# Altium PCB PCB1.PcbDoc (part 2 of 3)
Units mm, origin at the board's own origin, x right, y up, seen from the top; angles counter-clockwise.
Board outline 297.31 x 194.82 mm, 2 copper layers (Top Layer, Bottom Layer); 61 components, 34 nets, 159 pads, 65 vias.
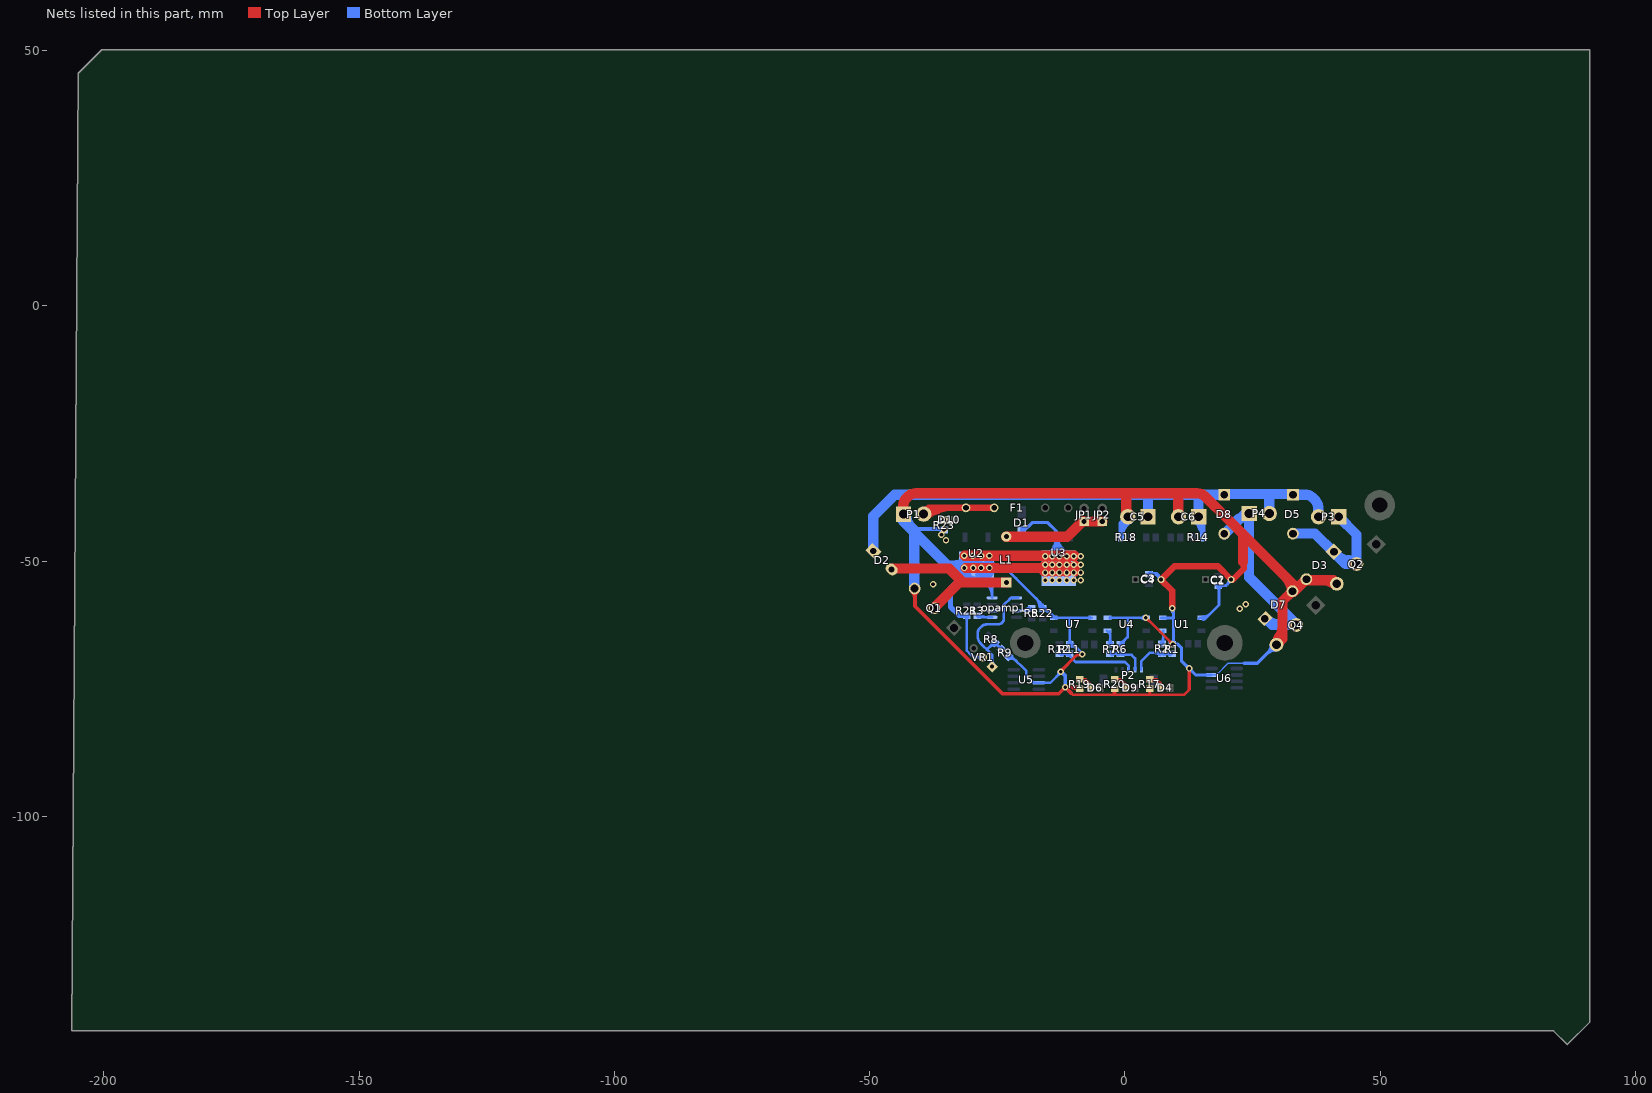
[diagram p2: the nets of this part, all layers, seen from the top]

## Via types
v1: diameter 1.27, hole 0.711, Top Layer to Bottom Layer, 63 vias
v2: diameter 1.016, hole 0.711, Top Layer to Bottom Layer, 2 vias

## Nets (pads, with @x,y where several pads share a name; then routed paths per layer and width w, separated by ;. In a path a pad name is that pad's centre, name@x,y a point inside that pad or via, vN(x,y) a via of type N, cw(c..) or ccw(c..) an arc to the next point about the centre after c; other vN are vias at no path point) (continued)
GND: C1.1 C2.2 C3.1 C4.2 C5.2 C6.2 D1.1 D3.1 D7.1 opamp1.4 P1.1 Q1.3 Q2.3 Q4.3 R1.2 R6.2 R9.1 R11.2 R17.1 R18.1 R19.1 R20.1 R21.2 R22.2 R23.1 U1.2 U1.3 U2.4 U3.4 U4.2 U4.3 U5.3 U6.3 U7.2 U7.3 VR1.2 | length 1292.9
  Top Layer w0.5: -10.541,-75.819 -10.229,-76.131 4.895,-76.131 ; R17.1@4.543,-75.274 cw(c3.86,-75.957) 4.826,-75.957 cw(c5.792,-75.957) R17.1@5.109,-75.274 ; 4.826,-76.073 R17.1@4.826,-74.991 ; 4.953,-76.073 4.895,-76.131 ; 12.573,-75.184 11.626,-76.131 4.895,-76.131
  Top Layer w0.508: v1@4.064,-61.468 cw(c4.064,-62.694) 4.931,-61.827 ; v1@4.127,-61.023 v1(9.398,-66.294) ; v1@4.445,-61.087 ccw(c5.058,-61.087) 4.625,-61.521 ; v1@9.017,-66.294 ccw(c8.097,-66.294) 8.748,-65.644 ccw(c9.398,-64.993) v1@9.398,-65.913
  Top Layer w0.635: v1@-12.7,-71.628 -9.398,-68.326 ; v1@-8.615,-67.984 cw(c-9.398,-67.26) -9.398,-68.326 ; v1@-8.382,-68.326 -9.398,-68.326 ; v1@-12.255,-71.628 cw(c-11.182,-71.628) -11.941,-70.869 ccw(c-11.182,-71.628) v1@-12.255,-71.628
  Top Layer w0.75: Q1.3@-41.148,-55.245 -41.148,-58.801 -39.478,-60.471 -39.478,-60.477 -24.003,-75.952 -12.96,-75.952 v1(-11.684,-74.676) ; -10.541,-75.819 v1(-11.684,-74.676) ; -10.414,-74.676 cw(c-10.414,-76.415) R19.1@-9.184,-75.185 ; R19.1@-8.89,-74.93 -9.144,-74.676 v1(-11.684,-74.676) ; R20.1@-2.226,-75.185 cw(c-2.696,-75.655) -2.032,-75.655 cw(c-1.368,-75.655) R20.1@-1.838,-75.185 ; -2.032,-76.006 R20.1@-2.032,-74.991 ; 12.573,-75.057 v1(12.573,-70.993) ; Q1.3@-41.74,-55.876 cw(c-43.168,-57.305) -41.148,-57.305 ; Q1.3@-41.74,-55.876 cw(c-43.168,-57.305) -41.148,-57.305 ; Q1.3@-41.74,-55.876 cw(c-43.168,-57.305) -41.148,-57.305 ; -41.148,-57.094 cw(c-39.426,-57.094) Q1.3@-40.644,-55.876 ; -41.148,-57.094 cw(c-39.426,-57.094) Q1.3@-40.644,-55.876 ; -41.148,-57.094 cw(c-39.426,-57.094) Q1.3@-40.644,-55.876
  Top Layer w1.27: v1(9.271,-59.182) 9.271,-55.793 C4.2@7.072,-53.594 9.739,-50.927 18.161,-50.927 20.828,-53.594 21.082,-53.594 23.241,-51.435 23.241,-50.292 23.114,-50.165 22.987,-50.038
  Top Layer w2: P1.1@-43.434,-40.767 -43.434,-39.263 cw(c-40.894,-39.263) -42.69,-37.467 -42.654,-37.431 cw(c-40.858,-39.227) -40.858,-36.687 14.045,-36.687 cw(c14.045,-39.227) 15.841,-37.431 17.027,-38.617 ; v1@-31.369,-48.895 v1(-28.194,-48.895) v1(-26.543,-48.895) v1@-9.906,-48.895 ; v1@-31.242,-51.308 v1(-26.543,-51.308) -10.287,-51.308 ccw(c-10.287,-53.181) v1@-11.707,-51.959 ; -16.886,-51.308 cw(c-16.886,-53.462) v1@-15.363,-51.939 ; -16.273,-51.308 ccw(c-16.273,-50.021) v1@-15.363,-50.931 ; v1@-15.879,-51.939 cw(c-14.356,-53.462) -14.356,-51.308 ; v1@-15.879,-50.931 ccw(c-14.969,-50.021) -14.969,-51.308 ; -15.489,-51.308 cw(c-15.489,-53.462) v1@-13.966,-51.939 ; -14.876,-51.308 ccw(c-14.876,-50.021) v1@-13.966,-50.931 ; v1@-14.482,-51.939 cw(c-12.959,-53.462) -12.959,-51.308 ; v1@-14.482,-50.931 ccw(c-13.572,-50.021) -13.572,-51.308 ; -14.092,-51.308 cw(c-14.092,-53.462) v1@-12.569,-51.939 ; -13.479,-51.308 ccw(c-13.479,-50.021) v1@-12.569,-50.931 ; v1@-13.085,-51.939 cw(c-11.562,-53.462) -11.562,-51.308 ; v1@-13.085,-50.931 ccw(c-12.175,-50.021) -12.175,-51.308 ; -12.695,-51.308 cw(c-12.695,-53.462) v1@-11.172,-51.939 ; -12.082,-51.308 ccw(c-12.082,-50.021) v1@-11.172,-50.931 ; v1@-11.688,-50.931 ccw(c-10.778,-50.021) -10.778,-51.308 ; -11.298,-51.308 cw(c-11.298,-53.462) v1@-9.775,-51.939 ; -10.685,-51.308 ccw(c-10.685,-50.021) v1@-9.775,-50.931 ; 0.254,-36.83 0.254,-41.275 C5.2@0.56,-41.275 ; 10.414,-38.1 10.414,-41.223 C6.2@10.466,-41.275 ; 17.204,-38.803 18.596,-40.195 18.605,-40.195 23.114,-44.704 ; 23.114,-50.165 23.114,-44.704 ; Q4.3@29.674,-66.338 30.861,-65.151 30.861,-57.785 32.639,-56.007 33.02,-56.007 D3.1@35.533,-53.494 ; 32.815,-54.405 23.114,-44.704 ; D3.1@35.306,-53.721 40.767,-53.721 Q2.3@41.529,-54.483 ; 0.254,-39.329 ccw(c2.506,-39.329) C5.2@0.914,-40.921 ; 0.254,-39.329 ccw(c2.506,-39.329) C5.2@0.914,-40.921 ; 0.254,-39.329 ccw(c2.506,-39.329) C5.2@0.914,-40.921 ; Q4.3@29.427,-66.09 ccw(c25.964,-62.628) 30.861,-62.628 ; Q4.3@29.427,-66.09 ccw(c25.964,-62.628) 30.861,-62.628 ; Q4.3@29.427,-66.09 ccw(c25.964,-62.628) 30.861,-62.628 ; Q4.3@30.012,-66.247 cw(c31.943,-65.73) 30.212,-64.73 ; Q4.3@30.012,-66.247 cw(c31.943,-65.73) 30.212,-64.73 ; Q4.3@30.012,-66.247 cw(c31.943,-65.73) 30.212,-64.73 ; 31.498,-53.088 cw(c28.732,-55.853) D7.1@32.643,-55.853 ; 31.498,-53.088 cw(c28.732,-55.853) D7.1@32.643,-55.853 ; 31.498,-53.088 cw(c28.732,-55.853) D7.1@32.643,-55.853 ; 39.002,-53.721 cw(c39.002,-56.883) Q2.3@41.238,-54.647 ; 39.002,-53.721 cw(c39.002,-56.883) Q2.3@41.238,-54.647 ; 39.002,-53.721 cw(c39.002,-56.883) Q2.3@41.238,-54.647 ; 39.989,-53.926 ccw(c40.839,-52.454) Q2.3@41.375,-54.068 ; 39.989,-53.926 ccw(c40.839,-52.454) Q2.3@41.375,-54.068 ; 39.989,-53.926 ccw(c40.839,-52.454) Q2.3@41.375,-54.068 ; -11.78,-51.366 ccw(c-12.063,-50.307) -11.114,-50.855 cw(c-12.063,-50.307) -11.78,-51.366 ; v1@-11.746,-50.855 ccw(c-10.797,-50.307) -11.08,-51.366 cw(c-10.797,-50.307) v1@-11.746,-50.855 ; -10.317,-51.316 ccw(c-10.573,-50.361) -9.717,-50.856 cw(c-10.573,-50.361) -10.317,-51.316
  Bottom Layer w0.305: U6.3@16.981,-72.263 17.907,-72.263 20.193,-69.977 23.241,-69.977 ; Q4.3@29.591,-66.294 Q4.3@29.718,-66.294 ; U6.3@17.881,-72.065 ccw(c17.881,-71.526) 18.263,-71.907 ; U6.3@17.881,-72.065 ccw(c17.881,-71.526) 18.263,-71.907 ; U6.3@17.881,-72.065 ccw(c17.881,-71.526) 18.263,-71.907 ; U6.3@18.079,-72.263 cw(c18.493,-72.263) 18.2,-71.97 ; U6.3@18.079,-72.263 cw(c18.493,-72.263) 18.2,-71.97 ; U6.3@18.079,-72.263 cw(c18.493,-72.263) 18.2,-71.97
  Bottom Layer w0.508: R21.2@-30.988,-60.64 -30.988,-67.509 -30.151,-68.346 -29.79,-68.707 VR1.2@-27.686,-68.707 ; U2.4@-28.357,-52.233 -26.022,-54.568 opamp1.4@-26.022,-57.036 ; U2.4@-26.543,-51.181 -23.499,-51.181 ; opamp1.4@-26.035,-57.023 opamp1.4@-26.022,-57.036 ; opamp1.4@-26.022,-57.15 opamp1.4@-26.022,-57.036 ; R9.1@-22.823,-68.924 R9.1@-22.823,-68.617 ; R9.1@-22.733,-68.707 -22.098,-68.707 -19.304,-71.501 -19.304,-72.517 -18.034,-73.787 U5.3@-16.981,-73.787 ; U5.3@-16.854,-73.787 -14.605,-73.787 v1@-12.446,-71.628 ; R22.2@-16.162,-59.215 R22.2@-16.129,-59.248 -15.555,-59.248 U7.2@-13.652,-61.151 ; R22.2@-16.129,-59.055 -16.129,-58.547 ; R22.2@-16.029,-59.644 cw(c-16.029,-61.744) -14.544,-60.259 ; -14.996,-59.807 cw(c-16.277,-61.087) U7.2@-14.466,-61.087 ; U7.2@-13.97,-61.087 -10.795,-61.087 ; U7.2@-13.531,-61.226 cw(c-13.197,-61.56) -13.197,-61.087 cw(c-13.197,-60.614) U7.2@-13.531,-60.948 ; -9.122,-67.332 cw(c-9.989,-68.199) v1@-8.763,-68.199 ; -8.816,-67.638 ccw(c-8.382,-67.205) v1@-8.382,-67.818 ; v1@-8.255,-68.199 -10.221,-66.233 R11.2@-10.795,-66.233 -10.795,-61.087 ; U7.3@-6.789,-61.226 ccw(c-7.123,-61.56) -7.123,-61.087 ccw(c-7.123,-60.614) U7.3@-6.789,-60.948 ; U7.3@-6.477,-61.087 -10.795,-61.087 ; U4.2@-2.99,-61.226 cw(c-2.656,-61.56) -2.656,-61.087 cw(c-2.656,-60.614) U4.2@-2.99,-60.948 ; U4.2@-2.988,-61.223 cw(c-2.667,-61.533) -2.667,-61.087 ; U4.2@-2.988,-60.951 ccw(c-2.667,-60.641) -2.667,-61.087 ; R6.2@-0.889,-66.233 0.508,-64.836 0.508,-61.087 ; U4.3@3.752,-61.226 ccw(c3.418,-61.56) 3.418,-61.087 ccw(c3.418,-60.614) U4.3@3.752,-60.948 ; U4.3@3.795,-61.356 ccw(c3.144,-62.007) 3.144,-61.087 ccw(c3.144,-60.167) U4.3@3.795,-60.818 ; v1(4.064,-61.087) 0.508,-61.087 ; U1.3@14.478,-61.214 14.605,-61.087 15.875,-61.087 18.415,-58.547 18.415,-54.991 18.161,-54.737 19.812,-54.737 C2.2@20.828,-53.721 ; U1.3@15.286,-61.399 ccw(c15.286,-60.73) 15.759,-61.203 ; U1.3@15.286,-60.891 ccw(c15.286,-58.996) 16.626,-60.336 ; U1.3@15.425,-61.226 cw(c15.759,-61.56) 15.759,-61.087 cw(c15.759,-60.614) U1.3@15.425,-60.948 ; R21.2@-31.268,-60.92 cw(c-31.944,-61.596) -30.988,-61.596 ; R21.2@-31.268,-60.92 cw(c-31.944,-61.596) -30.988,-61.596 ; R21.2@-31.268,-60.92 cw(c-31.944,-61.596) -30.988,-61.596 ; -30.988,-61.596 cw(c-30.032,-61.596) R21.2@-30.708,-60.92 ; -30.988,-61.596 cw(c-30.032,-61.596) R21.2@-30.708,-60.92 ; -30.988,-61.596 cw(c-30.032,-61.596) R21.2@-30.708,-60.92 ; -29.438,-68.707 cw(c-29.438,-70.459) VR1.2@-28.199,-69.22 ; -29.438,-68.707 cw(c-29.438,-70.459) VR1.2@-28.199,-69.22 ; -29.438,-68.707 cw(c-29.438,-70.459) VR1.2@-28.199,-69.22 ; U2.4@-29.388,-51.117 ccw(c-28.083,-50.36) U2.4@-28.471,-51.818 ; U2.4@-29.388,-51.117 ccw(c-28.083,-50.36) U2.4@-28.471,-51.818 ; U2.4@-29.388,-51.117 ccw(c-28.083,-50.36) U2.4@-28.471,-51.818 ; U2.4@-29.388,-51.117 ccw(c-28.083,-50.36) U2.4@-28.471,-51.818 ; U2.4@-29.388,-51.117 ccw(c-28.083,-50.36) U2.4@-28.471,-51.818 ; U2.4@-29.107,-53.687 cw(c-29.141,-56.806) -26.022,-56.806 ; U2.4@-29.107,-53.687 cw(c-29.141,-56.806) -26.022,-56.806 ; U2.4@-29.107,-53.687 cw(c-29.141,-56.806) -26.022,-56.806 ; U2.4@-29.101,-53.179 cw(c-29.135,-56.292) -26.022,-56.292 ; U2.4@-29.101,-53.179 cw(c-29.135,-56.292) -26.022,-56.292 ; U2.4@-29.101,-53.179 cw(c-29.135,-56.292) -26.022,-56.292 ; U2.4@-29.095,-52.671 cw(c-29.13,-55.778) -26.022,-55.778 ; U2.4@-29.095,-52.671 cw(c-29.13,-55.778) -26.022,-55.778 ; U2.4@-29.095,-52.671 cw(c-29.13,-55.778) -26.022,-55.778 ; U2.4@-29.09,-52.163 cw(c-29.124,-55.265) -26.022,-55.265 ; U2.4@-29.09,-52.163 cw(c-29.124,-55.265) -26.022,-55.265 ; U2.4@-29.09,-52.163 cw(c-29.124,-55.265) -26.022,-55.265 ; U2.4@-29.084,-51.655 cw(c-29.118,-54.751) U2.4@-26.022,-54.751 ; U2.4@-29.084,-51.655 cw(c-29.118,-54.751) U2.4@-26.022,-54.751 ; U2.4@-29.084,-51.655 cw(c-29.118,-54.751) U2.4@-26.022,-54.751 ; -28.825,-68.707 ccw(c-28.825,-67.822) VR1.2@-28.199,-68.448 ; -28.825,-68.707 ccw(c-28.825,-67.822) VR1.2@-28.199,-68.448 ; -28.825,-68.707 ccw(c-28.825,-67.822) VR1.2@-28.199,-68.448 ; U2.4@-28.319,-51.331 ccw(c-27.144,-51.113) U2.4@-27.82,-52.098 ; U2.4@-28.319,-51.331 ccw(c-27.144,-51.113) U2.4@-27.82,-52.098 ; U2.4@-28.319,-51.331 ccw(c-27.144,-51.113) U2.4@-27.82,-52.098 ; U2.4@-28.319,-51.331 ccw(c-27.144,-51.113) U2.4@-27.82,-52.098 ; U2.4@-28.319,-51.331 ccw(c-27.144,-51.113) U2.4@-27.82,-52.098 ; U2.4@-27.819,-51.238 ccw(c-25.438,-50.797) U2.4@-26.81,-52.793 ; U2.4@-27.819,-51.238 ccw(c-25.438,-50.797) U2.4@-26.81,-52.793 ; U2.4@-27.819,-51.238 ccw(c-25.438,-50.797) U2.4@-26.81,-52.793 ; U2.4@-27.819,-51.238 ccw(c-25.438,-50.797) U2.4@-26.81,-52.793 ; U2.4@-27.819,-51.238 ccw(c-25.438,-50.797) U2.4@-26.81,-52.793 ; U2.4@-27.399,-50.178 cw(c-28.24,-51.195) U2.4@-26.923,-51.283 ; U2.4@-27.399,-50.178 cw(c-28.24,-51.195) U2.4@-26.923,-51.283 ; U2.4@-27.399,-50.178 cw(c-28.24,-51.195) U2.4@-26.923,-51.283 ; U2.4@-27.399,-50.178 cw(c-28.24,-51.195) U2.4@-26.923,-51.283 ; U2.4@-27.399,-50.178 cw(c-28.24,-51.195) U2.4@-26.923,-51.283 ; U2.4@-27.351,-50.217 ccw(c-25.476,-48.875) -25.476,-51.181 ; U2.4@-27.351,-50.217 ccw(c-25.476,-48.875) -25.476,-51.181 ; U2.4@-27.351,-50.217 ccw(c-25.476,-48.875) -25.476,-51.181 ; U2.4@-27.185,-52.424 cw(c-25.157,-53.458) -25.157,-51.181 ; U2.4@-27.185,-52.424 cw(c-25.157,-53.458) -25.157,-51.181 ; U2.4@-27.185,-52.424 cw(c-25.157,-53.458) -25.157,-51.181 ; U2.4@-27.165,-52.401 ccw(c-28,-51.658) U2.4@-26.913,-51.397 ; U2.4@-27.165,-52.401 ccw(c-28,-51.658) U2.4@-26.913,-51.397 ; U2.4@-27.165,-52.401 ccw(c-28,-51.658) U2.4@-26.913,-51.397 ; U2.4@-27.165,-52.401 ccw(c-28,-51.658) U2.4@-26.913,-51.397 ; U2.4@-27.165,-52.401 ccw(c-28,-51.658) U2.4@-26.913,-51.397 ; U2.4@-27.067,-51.666 ccw(c-26.533,-51.301) U2.4@-26.296,-51.904 ; U2.4@-27.067,-51.666 ccw(c-26.533,-51.301) U2.4@-26.296,-51.904 ; U2.4@-27.067,-51.666 ccw(c-26.533,-51.301) U2.4@-26.296,-51.904 ; U2.4@-27.067,-51.666 ccw(c-26.533,-51.301) U2.4@-26.296,-51.904 ; U2.4@-27.067,-51.666 ccw(c-26.533,-51.301) U2.4@-26.296,-51.904 ; U2.4@-26.983,-49.88 cw(c-27.608,-50.558) U2.4@-26.854,-51.088 ; U2.4@-26.983,-49.88 cw(c-27.608,-50.558) U2.4@-26.854,-51.088 ; U2.4@-26.983,-49.88 cw(c-27.608,-50.558) U2.4@-26.854,-51.088 ; U2.4@-26.983,-49.88 cw(c-27.608,-50.558) U2.4@-26.854,-51.088 ; U2.4@-26.983,-49.88 cw(c-27.608,-50.558) U2.4@-26.854,-51.088 ; U2.4@-26.938,-49.921 ccw(c-24.487,-48.167) -24.487,-51.181 ; U2.4@-26.938,-49.921 ccw(c-24.487,-48.167) -24.487,-51.181 ; U2.4@-26.938,-49.921 ccw(c-24.487,-48.167) -24.487,-51.181 ; U2.4@-26.733,-52.655 cw(c-24.328,-53.88) -24.328,-51.181 ; U2.4@-26.733,-52.655 cw(c-24.328,-53.88) -24.328,-51.181 ; U2.4@-26.733,-52.655 cw(c-24.328,-53.88) -24.328,-51.181 ; U2.4@-26.648,-51.38 ccw(c-25.992,-50.932) U2.4@-25.703,-51.671 ; U2.4@-26.648,-51.38 ccw(c-25.992,-50.932) U2.4@-25.703,-51.671 ; U2.4@-26.648,-51.38 ccw(c-25.992,-50.932) U2.4@-25.703,-51.671 ; U2.4@-26.648,-51.38 ccw(c-25.992,-50.932) U2.4@-25.703,-51.671 ; U2.4@-26.648,-51.38 ccw(c-25.992,-50.932) U2.4@-25.703,-51.671 ; U2.4@-26.557,-50.272 cw(c-27.13,-50.894) U2.4@-26.439,-51.381 ; U2.4@-26.557,-50.272 cw(c-27.13,-50.894) U2.4@-26.439,-51.381 ; U2.4@-26.557,-50.272 cw(c-27.13,-50.894) U2.4@-26.439,-51.381 ; U2.4@-26.557,-50.272 cw(c-27.13,-50.894) U2.4@-26.439,-51.381 ; U2.4@-26.557,-50.272 cw(c-27.13,-50.894) U2.4@-26.439,-51.381 ; U2.4@-26.525,-49.626 ccw(c-23.499,-47.459) -23.499,-51.181 ; U2.4@-26.525,-49.626 ccw(c-23.499,-47.459) -23.499,-51.181 ; U2.4@-26.525,-49.626 ccw(c-23.499,-47.459) -23.499,-51.181 ; U2.4@-26.28,-52.885 cw(c-23.499,-54.302) -23.499,-51.181 ; U2.4@-26.28,-52.885 cw(c-23.499,-54.302) -23.499,-51.181 ; U2.4@-26.28,-52.885 cw(c-23.499,-54.302) -23.499,-51.181 ; U2.4@-26.238,-51.08 ccw(c-25.74,-50.709) -25.559,-51.303 ; U2.4@-26.238,-51.08 ccw(c-25.74,-50.709) -25.559,-51.303 ; U2.4@-26.238,-51.08 ccw(c-25.74,-50.709) -25.559,-51.303 ; U2.4@-26.238,-51.08 ccw(c-25.74,-50.709) -25.559,-51.303 ; U2.4@-26.238,-51.08 ccw(c-25.74,-50.709) -25.559,-51.303 ; U2.4@-26.228,-51.093 ccw(c-25.452,-50.564) -25.109,-51.438 ; U2.4@-26.228,-51.093 ccw(c-25.452,-50.564) -25.109,-51.438 ; U2.4@-26.228,-51.093 ccw(c-25.452,-50.564) -25.109,-51.438 ; U2.4@-26.228,-51.093 ccw(c-25.452,-50.564) -25.109,-51.438 ; U2.4@-26.228,-51.093 ccw(c-25.452,-50.564) -25.109,-51.438 ; U2.4@-26.131,-50.665 cw(c-26.653,-51.231) U2.4@-26.024,-51.674 ; U2.4@-26.131,-50.665 cw(c-26.653,-51.231) U2.4@-26.024,-51.674 ; U2.4@-26.131,-50.665 cw(c-26.653,-51.231) U2.4@-26.024,-51.674 ; U2.4@-26.131,-50.665 cw(c-26.653,-51.231) U2.4@-26.024,-51.674 ; U2.4@-26.131,-50.665 cw(c-26.653,-51.231) U2.4@-26.024,-51.674 ; -23.499,-51.181 -21.336,-53.344 -21.332,-53.344 -16.129,-58.547 ; R9.1@-22.85,-68.602 ccw(c-21.954,-68.086) -22.222,-69.084 ; R9.1@-22.85,-68.602 ccw(c-21.954,-68.086) -22.222,-69.084 ; R9.1@-22.85,-68.602 ccw(c-21.954,-68.086) -22.222,-69.084 ; R9.1@-22.753,-68.942 cw(c-22.753,-71.09) -21.234,-69.571 ; R9.1@-22.753,-68.942 cw(c-22.753,-71.09) -21.234,-69.571 ; R9.1@-22.753,-68.942 cw(c-22.753,-71.09) -21.234,-69.571 ; R9.1@-22.753,-68.434 cw(c-22.753,-69.355) R9.1@-22.101,-68.704 ; R9.1@-22.753,-68.434 cw(c-22.753,-69.355) R9.1@-22.101,-68.704 ; R9.1@-22.753,-68.434 cw(c-22.753,-69.355) R9.1@-22.101,-68.704 ; -18.396,-73.425 ccw(c-17.754,-72.783) U5.3@-17.754,-73.691 ; -18.396,-73.425 ccw(c-17.754,-72.783) U5.3@-17.754,-73.691 ; -18.396,-73.425 ccw(c-17.754,-72.783) U5.3@-17.754,-73.691 ; -18.17,-73.58 cw(c-18.312,-74.109) U5.3@-17.837,-73.835 ; -18.17,-73.58 cw(c-18.312,-74.109) U5.3@-17.837,-73.835 ; -18.17,-73.58 cw(c-18.312,-74.109) U5.3@-17.837,-73.835 ; -17.471,-57.205 cw(c-19.515,-59.248) R22.2@-16.625,-59.248 ; -17.471,-57.205 cw(c-19.515,-59.248) R22.2@-16.625,-59.248 ; -17.471,-57.205 cw(c-19.515,-59.248) R22.2@-16.625,-59.248 ; -16.604,-58.072 cw(c-17.78,-59.248) R22.2@-16.117,-59.248 ; -16.604,-58.072 cw(c-17.78,-59.248) R22.2@-16.117,-59.248 ; -16.604,-58.072 cw(c-17.78,-59.248) R22.2@-16.117,-59.248 ; R22.2@-16.333,-58.909 ccw(c-16.551,-58.547) -16.129,-58.547 ; R22.2@-16.333,-58.909 ccw(c-16.551,-58.547) -16.129,-58.547 ; R22.2@-16.333,-58.909 ccw(c-16.551,-58.547) -16.129,-58.547 ; -16.129,-58.547 ccw(c-15.707,-58.547) R22.2@-15.925,-58.909 ; -16.129,-58.547 ccw(c-15.707,-58.547) R22.2@-15.925,-58.909 ; -16.129,-58.547 ccw(c-15.707,-58.547) R22.2@-15.925,-58.909 ; R11.2@-11.075,-65.953 ccw(c-11.751,-65.277) -10.795,-65.277 ; R11.2@-11.075,-65.953 ccw(c-11.751,-65.277) -10.795,-65.277 ; R11.2@-11.075,-65.953 ccw(c-11.751,-65.277) -10.795,-65.277 ; -10.795,-65.277 ccw(c-9.839,-65.277) R11.2@-10.515,-65.953 ; -10.795,-65.277 ccw(c-9.839,-65.277) R11.2@-10.515,-65.953 ; -10.795,-65.277 ccw(c-9.839,-65.277) R11.2@-10.515,-65.953 ; R11.2@-10.793,-66.288 ccw(c-9.91,-65.791) R11.2@-10.172,-66.769 ; R11.2@-10.793,-66.288 ccw(c-9.91,-65.791) R11.2@-10.172,-66.769 ; R11.2@-10.793,-66.288 ccw(c-9.91,-65.791) R11.2@-10.172,-66.769 ; R11.2@-10.695,-66.629 cw(c-10.695,-68.729) -9.21,-67.244 ; R11.2@-10.695,-66.629 cw(c-10.695,-68.729) -9.21,-67.244 ; R11.2@-10.695,-66.629 cw(c-10.695,-68.729) -9.21,-67.244 ; -2.667,-61.087 0.508,-61.087 ; R6.2@-0.789,-65.837 ccw(c-0.789,-65.122) R6.2@-0.284,-65.628 ; R6.2@-0.789,-65.837 ccw(c-0.789,-65.122) R6.2@-0.284,-65.628 ; R6.2@-0.789,-65.837 ccw(c-0.789,-65.122) R6.2@-0.284,-65.628 ; R6.2@-0.393,-66.233 cw(c0.804,-66.233) -0.042,-65.386 ; R6.2@-0.393,-66.233 cw(c0.804,-66.233) -0.042,-65.386 ; R6.2@-0.393,-66.233 cw(c0.804,-66.233) -0.042,-65.386 ; C1.1@18.108,-55.078 cw(c17.367,-55.819) 18.415,-55.819 ; C1.1@18.108,-55.078 cw(c17.367,-55.819) 18.415,-55.819 ; C1.1@18.108,-55.078 cw(c17.367,-55.819) 18.415,-55.819 ; 18.415,-55.689 cw(c19.279,-55.689) C1.1@18.668,-55.078 ; 18.415,-55.689 cw(c19.279,-55.689) C1.1@18.668,-55.078 ; 18.415,-55.689 cw(c19.279,-55.689) C1.1@18.668,-55.078 ; C1.1@18.668,-55.078 cw(c19.491,-55.901) 19.491,-54.737 ; C1.1@18.668,-55.078 cw(c19.491,-55.901) 19.491,-54.737 ; C1.1@18.668,-55.078 cw(c19.491,-55.901) 19.491,-54.737 ; C1.1@18.668,-54.518 ccw(c19.197,-53.989) 19.197,-54.737 ; C1.1@18.668,-54.518 ccw(c19.197,-53.989) 19.197,-54.737 ; C1.1@18.668,-54.518 ccw(c19.197,-53.989) 19.197,-54.737 ; 19.951,-54.598 ccw(c18.947,-53.594) C2.2@20.367,-53.594 ; 19.951,-54.598 ccw(c18.947,-53.594) C2.2@20.367,-53.594 ; 19.951,-54.598 ccw(c18.947,-53.594) C2.2@20.367,-53.594 ; 20.24,-54.066 cw(c21.019,-54.275) C2.2@20.76,-53.512 ; 20.24,-54.066 cw(c21.019,-54.275) C2.2@20.76,-53.512 ; 20.24,-54.066 cw(c21.019,-54.275) C2.2@20.76,-53.512 ; 20.354,-54.195 cw(c20.788,-54.628) C2.2@20.788,-54.015 ; 20.354,-54.195 cw(c20.788,-54.628) C2.2@20.788,-54.015 ; 20.354,-54.195 cw(c20.788,-54.628) C2.2@20.788,-54.015 ; U2.4@-29.494,-51.616 cw(c-29.195,-52.027) -28.836,-51.667 ccw(c-29.195,-52.027) U2.4@-29.494,-51.616 ; U2.4@-28.16,-51.186 cw(c-28.384,-51.987) -27.633,-51.629 ccw(c-28.384,-51.987) U2.4@-28.16,-51.186 ; U2.4@-27.009,-50.85 ccw(c-26.174,-50.685) -26.608,-51.417 cw(c-26.174,-50.685) U2.4@-27.009,-50.85 ; U2.4@-26.926,-51.88 cw(c-25.976,-51.905) -26.63,-51.216 ccw(c-25.976,-51.905) U2.4@-26.926,-51.88 ; U2.4@-26.274,-51.577 cw(c-25.317,-52.534) -25.317,-51.181 ccw(c-25.317,-52.534) U2.4@-26.274,-51.577 ; R22.2@-16.767,-58.716 ccw(c-15.767,-58.448) -16.285,-59.345 cw(c-15.767,-58.448) R22.2@-16.767,-58.716 ; -13.313,-72.495 ccw(c-14.18,-71.628) -12.954,-71.628 cw(c-14.18,-71.628) -13.313,-72.495 ; -13.007,-72.189 cw(c-12.573,-72.622) -12.573,-72.009 ccw(c-12.573,-72.622) -13.007,-72.189
  Bottom Layer w0.6: P1.1@-43.382,-41.967 cw(c-43.382,-44.864) -41.333,-42.816 cw(c-39.285,-40.767) P1.1@-42.182,-40.767 ; P1.1@-43.382,-40.767 -40.461,-43.688 ; -36.832,-43.688 cw(c-36.832,-45.175) R23.1@-35.78,-44.123 ; -36.548,-43.688 cw(c-36.548,-44.93) R23.1@-35.67,-44.052
  Bottom Layer w0.635: D1.1@-20.193,-44.418 -18.193,-42.418 -15.113,-42.418 -13.462,-44.069 ; U3.4@-14.449,-48.797 ccw(c-16.83,-46.416) -13.462,-46.416 ; U3.4@-14.224,-49.34 cw(c-14.224,-51.946) U3.4@-12.381,-50.103 ; U3.4@-14.224,-48.704 cw(c-14.224,-49.778) U3.4@-13.465,-49.019 ; U3.4@-14.195,-48.67 ccw(c-15.963,-46.902) -13.462,-46.902 ; U3.4@-14.113,-48.724 ccw(c-13.897,-48.145) U3.4@-13.361,-48.454 ; U3.4@-13.999,-49.247 ccw(c-15.297,-47.949) U3.4@-13.462,-47.949 ; U3.4@-13.97,-49.212 cw(c-13.97,-50.899) U3.4@-12.778,-49.706 ; U3.4@-13.949,-48.863 ccw(c-12.936,-48.278) U3.4@-13.238,-49.409 ; U3.4@-13.79,-47.969 ccw(c-12.682,-48.609) U3.4@-13.917,-48.94 ; U3.4@-13.745,-49.12 ccw(c-14.43,-48.435) U3.4@-13.462,-48.435 ; U3.4@-13.462,-48.255 ccw(c-12.06,-48.255) U3.4@-13.052,-49.247 ; -13.462,-46.722 ccw(c-10.527,-46.722) U3.4@-12.602,-48.797 ; U3.4@-13.125,-50.563 ccw(c-14.495,-50.055) U3.4@-13.462,-49.022 ; U3.4@-12.761,-49.723 cw(c-13.473,-50.434) U3.4@-12.529,-50.783 ; U3.4@-12.532,-49.139 ccw(c-11.644,-49.49) -12.319,-50.165 U3.4@-13.462,-49.022 ; U1.2@7.112,-61.087 9.525,-61.087 ; v1@9.271,-59.055 9.525,-59.309 R1.2@9.525,-66.04 ; R1.2@9.283,-66.233 10.353,-66.233 11.049,-66.929 11.049,-69.469 13.843,-72.263 U6.3@16.891,-72.263 ; 9.381,-59.986 cw(c9.767,-59.762) v1@9.477,-59.423 ; v1@12.255,-70.993 ccw(c11.489,-70.993) 12.031,-70.451 ccw(c12.573,-69.909) v1@12.573,-70.675 ; v1@12.573,-71.31 cw(c12.573,-72.077) 13.115,-71.535 cw(c13.657,-70.993) v1@12.89,-70.993 ; 23.368,-69.977 25.908,-69.977 29.547,-66.338 Q4.3@29.674,-66.338 ; D1.1@-20.287,-43.976 cw(c-19.178,-44.469) D1.1@-19.492,-43.298 ; D1.1@-20.287,-43.976 cw(c-19.178,-44.469) D1.1@-19.492,-43.298 ; D1.1@-20.287,-43.976 cw(c-19.178,-44.469) D1.1@-19.492,-43.298 ; D1.1@-20.193,-43.486 ccw(c-20.193,-41.234) -18.601,-42.826 ; D1.1@-20.193,-43.486 ccw(c-20.193,-41.234) -18.601,-42.826 ; D1.1@-20.193,-43.486 ccw(c-20.193,-41.234) -18.601,-42.826 ; U3.4@-15.68,-48.71 ccw(c-16.123,-46.364) -14.15,-47.709 ; U3.4@-15.68,-48.71 ccw(c-16.123,-46.364) -14.15,-47.709 ; U3.4@-15.68,-48.71 ccw(c-16.123,-46.364) -14.15,-47.709 ; U3.4@-15.134,-49.15 ccw(c-19.169,-45.115) -13.462,-45.115 ; U3.4@-15.134,-49.15 ccw(c-19.169,-45.115) -13.462,-45.115 ; U3.4@-15.134,-49.15 ccw(c-19.169,-45.115) -13.462,-45.115 ; U3.4@-14.685,-49.599 ccw(c-17.636,-46.648) -13.462,-46.648 ; U3.4@-14.685,-49.599 ccw(c-17.636,-46.648) -13.462,-46.648 ; U3.4@-14.685,-49.599 ccw(c-17.636,-46.648) -13.462,-46.648 ; U3.4@-14.517,-49.145 cw(c-13.548,-48.737) U3.4@-14.486,-48.262 ; U3.4@-14.517,-49.145 cw(c-13.548,-48.737) U3.4@-14.486,-48.262 ; U3.4@-14.517,-49.145 cw(c-13.548,-48.737) U3.4@-14.486,-48.262 ; U3.4@-13.931,-48.899 cw(c-11.893,-48.039) -13.867,-47.039 ; U3.4@-13.931,-48.899 cw(c-11.893,-48.039) -13.867,-47.039 ; U3.4@-13.931,-48.899 cw(c-11.893,-48.039) -13.867,-47.039 ; U3.4@-13.917,-48.94 cw(c-12.813,-48.644) U3.4@-13.803,-48.073 ; U3.4@-13.917,-48.94 cw(c-12.813,-48.644) U3.4@-13.803,-48.073 ; U3.4@-13.917,-48.94 cw(c-12.813,-48.644) U3.4@-13.803,-48.073 ; U3.4@-13.462,-49.022 -13.462,-44.069 ; -13.462,-47.922 ccw(c-10.351,-47.922) U3.4@-12.239,-50.394 ; -13.462,-47.922 ccw(c-10.351,-47.922) U3.4@-12.239,-50.394 ; -13.462,-47.922 ccw(c-10.351,-47.922) U3.4@-12.239,-50.394 ; -13.462,-46.638 ccw(c-9.37,-46.638) U3.4@-11.854,-49.89 ; -13.462,-46.638 ccw(c-9.37,-46.638) U3.4@-11.854,-49.89 ; -13.462,-46.638 ccw(c-9.37,-46.638) U3.4@-11.854,-49.89 ; -13.462,-45.353 ccw(c-8.389,-45.353) U3.4@-11.468,-49.385 ; -13.462,-45.353 ccw(c-8.389,-45.353) U3.4@-11.468,-49.385 ; -13.462,-45.353 ccw(c-8.389,-45.353) U3.4@-11.468,-49.385 ; -13.462,-44.069 ccw(c-7.408,-44.069) U3.4@-11.083,-48.88 ; -13.462,-44.069 ccw(c-7.408,-44.069) U3.4@-11.083,-48.88 ; -13.462,-44.069 ccw(c-7.408,-44.069) U3.4@-11.083,-48.88 ; U3.4@-13.12,-49.251 cw(c-13.954,-49.894) U3.4@-13.088,-50.492 ; U3.4@-13.12,-49.251 cw(c-13.954,-49.894) U3.4@-13.088,-50.492 ; U3.4@-13.12,-49.251 cw(c-13.954,-49.894) U3.4@-13.088,-50.492 ; U3.4@-13.11,-48.877 ccw(c-14.187,-48.327) U3.4@-13.036,-47.955 ; U3.4@-13.11,-48.877 ccw(c-14.187,-48.327) U3.4@-13.036,-47.955 ; U3.4@-13.11,-48.877 ccw(c-14.187,-48.327) U3.4@-13.036,-47.955 ; U3.4@-13.104,-48.867 ccw(c-14.747,-47.95) -13.071,-47.094 ; U3.4@-13.104,-48.867 ccw(c-14.747,-47.95) -13.071,-47.094 ; U3.4@-13.104,-48.867 ccw(c-14.747,-47.95) -13.071,-47.094 ; U3.4@-13.011,-48.763 cw(c-12.566,-49.39) U3.4@-12.031,-48.839 ; U3.4@-13.011,-48.763 cw(c-12.566,-49.39) U3.4@-12.031,-48.839 ; U3.4@-13.011,-48.763 cw(c-12.566,-49.39) U3.4@-12.031,-48.839 ; U3.4@-12.831,-49.339 cw(c-12.846,-50.42) U3.4@-12.072,-49.666 ; U3.4@-12.831,-49.339 cw(c-12.846,-50.42) U3.4@-12.072,-49.666 ; U3.4@-12.831,-49.339 cw(c-12.846,-50.42) U3.4@-12.072,-49.666 ; U3.4@-12.643,-49.281 cw(c-12.117,-50.024) U3.4@-11.483,-49.371 ; U3.4@-12.643,-49.281 cw(c-12.117,-50.024) U3.4@-11.483,-49.371 ; U3.4@-12.643,-49.281 cw(c-12.117,-50.024) U3.4@-11.483,-49.371 ; U3.4@-12.59,-49.94 cw(c-13.203,-50.413) U3.4@-12.566,-50.854 ; U3.4@-12.59,-49.94 cw(c-13.203,-50.413) U3.4@-12.566,-50.854 ; U3.4@-12.59,-49.94 cw(c-13.203,-50.413) U3.4@-12.566,-50.854 ; U3.4@-12.55,-49.177 ccw(c-13.499,-48.647) U3.4@-12.531,-48.152 ; U3.4@-12.55,-49.177 ccw(c-13.499,-48.647) U3.4@-12.531,-48.152 ; U3.4@-12.55,-49.177 ccw(c-13.499,-48.647) U3.4@-12.531,-48.152 ; U3.4@-12.522,-49.11 ccw(c-11.207,-49.49) U3.4@-12.301,-50.312 ; U3.4@-12.522,-49.11 ccw(c-11.207,-49.49) U3.4@-12.301,-50.312 ; U3.4@-12.522,-49.11 ccw(c-11.207,-49.49) U3.4@-12.301,-50.312 ; U3.4@-12.469,-48.087 ccw(c-11.18,-47.094) U3.4@-11.389,-48.707 ; U3.4@-12.469,-48.087 ccw(c-11.18,-47.094) U3.4@-11.389,-48.707 ; U3.4@-12.469,-48.087 ccw(c-11.18,-47.094) U3.4@-11.389,-48.707 ; U3.4@-12.307,-48.685 ccw(c-11.884,-47.926) U3.4@-11.551,-48.729 ; U3.4@-12.307,-48.685 ccw(c-11.884,-47.926) U3.4@-11.551,-48.729 ; U3.4@-12.307,-48.685 ccw(c-11.884,-47.926) U3.4@-11.551,-48.729 ; -12.202,-47.544 cw(c-13.724,-48.819) U3.4@-11.746,-48.994 ; -12.202,-47.544 cw(c-13.724,-48.819) U3.4@-11.746,-48.994 ; -12.202,-47.544 cw(c-13.724,-48.819) U3.4@-11.746,-48.994 ; R1.2@9.148,-65.998 ccw(c8.238,-65.088) 9.525,-65.088 ; R1.2@9.148,-65.998 ccw(c8.238,-65.088) 9.525,-65.088 ; R1.2@9.148,-65.998 ccw(c8.238,-65.088) 9.525,-65.088 ; R1.2@9.618,-66.468 cw(c10.186,-67.036) 10.186,-66.233 ; R1.2@9.618,-66.468 cw(c10.186,-67.036) 10.186,-66.233 ; R1.2@9.618,-66.468 cw(c10.186,-67.036) 10.186,-66.233 ; R1.2@9.618,-65.998 ccw(c10.186,-65.43) 10.186,-66.233 ; R1.2@9.618,-65.998 ccw(c10.186,-65.43) 10.186,-66.233 ; R1.2@9.618,-65.998 ccw(c10.186,-65.43) 10.186,-66.233 ; 27.695,-68.19 cw(c29.674,-70.17) Q4.3@29.674,-67.37 ; 27.695,-68.19 cw(c29.674,-70.17) Q4.3@29.674,-67.37 ; 27.695,-68.19 cw(c29.674,-70.17) Q4.3@29.674,-67.37 ; 28.001,-67.884 ccw(c26.456,-66.338) Q4.3@28.642,-66.338 ; 28.001,-67.884 ccw(c26.456,-66.338) Q4.3@28.642,-66.338 ; 28.001,-67.884 ccw(c26.456,-66.338) Q4.3@28.642,-66.338 ; U3.4@-15.68,-48.583 ccw(c-16.168,-45.996) -13.994,-47.48 cw(c-16.168,-45.996) U3.4@-15.68,-48.583 ; U3.4@-15.562,-49.207 ccw(c-15.766,-48.127) -14.858,-48.746 cw(c-15.766,-48.127) U3.4@-15.562,-49.207 ; U3.4@-15.321,-49.127 cw(c-13.241,-49.856) -14.197,-47.869 ccw(c-13.241,-49.856) U3.4@-15.321,-49.127 ; U3.4@-15.215,-49.247 cw(c-14.638,-49.732) -14.168,-49.143 ccw(c-14.638,-49.732) U3.4@-15.215,-49.247 ; U3.4@-14.795,-48.748 cw(c-14.232,-49.222) -13.772,-48.647 ccw(c-14.232,-49.222) U3.4@-14.795,-48.748 ; U3.4@-14.699,-49.618 cw(c-13.836,-50.318) -13.94,-49.211 ccw(c-13.836,-50.318) U3.4@-14.699,-49.618 ; U3.4@-14.333,-48.031 ccw(c-13.388,-48.466) -14.226,-49.083 cw(c-13.388,-48.466) U3.4@-14.333,-48.031 ; U3.4@-14.292,-49.048 cw(c-15.64,-51.208) -13.139,-50.732 ccw(c-15.64,-51.208) U3.4@-14.292,-49.048 ; U3.4@-14.179,-48.708 ccw(c-14.058,-47.863) -13.298,-48.25 cw(c-14.058,-47.863) U3.4@-14.179,-48.708 ; U3.4@-14.042,-49.204 cw(c-14.74,-52.192) -12.134,-50.572 ccw(c-14.74,-52.192) U3.4@-14.042,-49.204 ; U3.4@-13.92,-48.93 ccw(c-12.942,-48.634) -13.424,-49.535 cw(c-12.942,-48.634) U3.4@-13.92,-48.93 ; U3.4@-13.907,-49.033 ccw(c-12.909,-49.067) -13.639,-49.748 cw(c-12.909,-49.067) U3.4@-13.907,-49.033 ; U3.4@-13.898,-48.586 cw(c-14.247,-50.08) -12.943,-49.27 ccw(c-14.247,-50.08) U3.4@-13.898,-48.586 ; -13.884,-47.054 ccw(c-12.399,-47.736) -13.714,-48.707 cw(c-12.399,-47.736) -13.884,-47.054 ; -13.793,-47.763 ccw(c-12.559,-48.13) -13.691,-48.744 cw(c-12.559,-48.13) -13.793,-47.763 ; U3.4@-13.736,-49.113 cw(c-13.024,-49.449) -12.694,-48.734 ccw(c-13.024,-49.449) U3.4@-13.736,-49.113 ; U3.4@-13.734,-49.107 ccw(c-14.618,-48.312) -13.435,-48.195 cw(c-14.618,-48.312) U3.4@-13.734,-49.107 ; U3.4@-13.511,-48.739 ccw(c-13.246,-48.457) -13.016,-48.767 cw(c-13.246,-48.457) U3.4@-13.511,-48.739 ; U3.4@-13.436,-48.255 ccw(c-12.057,-48.29) -13.057,-49.241 cw(c-12.057,-48.29) U3.4@-13.436,-48.255 ; U3.4@-13.381,-48.92 ccw(c-13.594,-47.719) -12.382,-47.858 cw(c-13.594,-47.719) U3.4@-13.381,-48.92 ; -13.316,-47.33 ccw(c-11.155,-46.459) -12.068,-48.603 cw(c-11.155,-46.459) -13.316,-47.33 ; -13.245,-47.412 cw(c-14.203,-48.239) -13.103,-48.865 ccw(c-14.203,-48.239) -13.245,-47.412 ; U3.4@-13.133,-48.937 ccw(c-12.238,-49.186) -12.881,-49.856 cw(c-12.238,-49.186) U3.4@-13.133,-48.937 ; U3.4@-13.061,-49.816 cw(c-13.699,-50.839) -12.515,-50.614 ccw(c-13.699,-50.839) U3.4@-13.061,-49.816 ; U3.4@-13.025,-48.773 ccw(c-14.16,-47.345) -12.347,-47.553 cw(c-14.16,-47.345) U3.4@-13.025,-48.773 ; U3.4@-12.885,-48.71 ccw(c-12.997,-48.102) -12.386,-48.011 cw(c-12.997,-48.102) U3.4@-12.885,-48.71 ; U3.4@-12.769,-49.334 ccw(c-12.877,-48.749) -12.289,-48.662 cw(c-12.877,-48.749) U3.4@-12.769,-49.334 ; -12.718,-46.898 cw(c-14.334,-48.05) -12.487,-48.779 ccw(c-14.334,-48.05) -12.718,-46.898 ; U3.4@-12.657,-48.092 cw(c-13.374,-48.711) -12.551,-49.179 ccw(c-13.374,-48.711) U3.4@-12.657,-48.092 ; -12.585,-47.897 cw(c-13.634,-48.458) -12.496,-48.803 ccw(c-13.634,-48.458) -12.585,-47.897 ; U3.4@-12.521,-49.107 ccw(c-11.078,-49.509) -12.115,-50.591 cw(c-11.078,-49.509) U3.4@-12.521,-49.107 ; U3.4@-12.394,-47.959 ccw(c-11.151,-48.101) -11.761,-49.193 cw(c-11.151,-48.101) U3.4@-12.394,-47.959 ; -12.249,-47.75 cw(c-12.851,-48.714) -11.74,-48.955 ccw(c-12.851,-48.714) -12.249,-47.75 ; U3.4@-12.218,-48.749 ccw(c-11.909,-48.431) -11.63,-48.775 cw(c-11.909,-48.431) U3.4@-12.218,-48.749 ; U3.4@-12.124,-49.205 cw(c-11.967,-49.919) -11.477,-49.377 ccw(c-11.967,-49.919) U3.4@-12.124,-49.205 ; -12.039,-47.851 cw(c-13.036,-48.562) -11.897,-49.011 ccw(c-13.036,-48.562) -12.039,-47.851 ; -11.982,-47.916 ccw(c-10.457,-46.494) -10.53,-48.578 cw(c-10.457,-46.494) -11.982,-47.916 ; U3.4@-11.929,-49.073 ccw(c-11.395,-49.435) -11.846,-49.897 cw(c-11.395,-49.435) U3.4@-11.929,-49.073 ; U3.4@-11.483,-48.228 cw(c-11.913,-48.917) -11.12,-49.089 ccw(c-11.913,-48.917) U3.4@-11.483,-48.228 ; U3.4@-11.33,-48.333 cw(c-11.833,-49.979) -10.313,-49.171 ccw(c-11.833,-49.979) U3.4@-11.33,-48.333 ; v1@9.046,-59.407 cw(c7.891,-60.562) 9.525,-60.562 ccw(c7.891,-60.562) v1@9.046,-59.407 ; R1.2@9.173,-66.069 ccw(c8.325,-65.221) 9.525,-65.221 cw(c8.325,-65.221) R1.2@9.173,-66.069 ; R1.2@9.623,-66.519 cw(c10.312,-67.208) 10.312,-66.233 ccw(c10.312,-67.208) R1.2@9.623,-66.519
  Bottom Layer w0.75: -40.461,-43.688 R23.1@-35.433,-43.688 ; v1@-12.446,-71.628 -11.684,-72.39 v1(-11.684,-74.676) ; C3.1@4.699,-52.517 6.162,-52.517 C4.2@7.112,-53.467 ; C4.2@7.092,-53.574 C4.2@7.112,-53.594 ; C3.1@4.993,-52.711 cw(c5.463,-53.181) 5.463,-52.517 ; C3.1@4.993,-52.711 cw(c5.463,-53.181) 5.463,-52.517 ; C3.1@4.993,-52.711 cw(c5.463,-53.181) 5.463,-52.517 ; C3.1@4.993,-52.323 ccw(c5.463,-51.853) 5.463,-52.517 ; C3.1@4.993,-52.323 ccw(c5.463,-51.853) 5.463,-52.517 ; C3.1@4.993,-52.323 ccw(c5.463,-51.853) 5.463,-52.517 ; 6.442,-52.797 cw(c5.645,-53.594) C4.2@6.772,-53.594 ; 6.442,-52.797 cw(c5.645,-53.594) C4.2@6.772,-53.594 ; 6.442,-52.797 cw(c5.645,-53.594) C4.2@6.772,-53.594 ; v1@-12.573,-71.888 cw(c-12.573,-72.822) -11.912,-72.162 ccw(c-12.573,-72.822) v1@-12.573,-71.888
  Bottom Layer w1: U2.4@-31.788,-51.893 cw(c-31.043,-52.093) U2.4@-31.428,-51.425 ; R21.2@-30.988,-60.64 -31.049,-60.579 -32.512,-60.579 -34.163,-58.928 -34.163,-55.245 ; U2.4@-30.303,-51.6 ccw(c-30.503,-50.855) U2.4@-29.835,-51.24 ; R18.1@-0.762,-45.085 -0.762,-42.597 C5.2@0.56,-41.275 ; -34.163,-55.245 cw(c-31.342,-58.066) U2.4@-30.034,-54.297 ; -34.163,-55.245 cw(c-31.342,-58.066) U2.4@-30.034,-54.297 ; -34.163,-55.245 cw(c-31.342,-58.066) U2.4@-30.034,-54.297 ; -34.163,-55.245 U2.4@-30.099,-51.181 ; -33.049,-54.131 ccw(c-35.624,-51.557) U2.4@-31.983,-51.557 ; -33.049,-54.131 ccw(c-35.624,-51.557) U2.4@-31.983,-51.557 ; -33.049,-54.131 ccw(c-35.624,-51.557) U2.4@-31.983,-51.557 ; -33.034,-54.116 cw(c-30.76,-56.39) U2.4@-29.706,-53.352 ; -33.034,-54.116 cw(c-30.76,-56.39) U2.4@-29.706,-53.352 ; -33.034,-54.116 cw(c-30.76,-56.39) U2.4@-29.706,-53.352 ; U2.4@-32.226,-52.464 cw(c-30.573,-52.908) U2.4@-31.428,-51.425 ; U2.4@-32.226,-52.464 cw(c-30.573,-52.908) U2.4@-31.428,-51.425 ; U2.4@-32.226,-52.464 cw(c-30.573,-52.908) U2.4@-31.428,-51.425 ; U2.4@-32.226,-52.464 cw(c-30.573,-52.908) U2.4@-31.428,-51.425 ; U2.4@-32.226,-52.464 cw(c-30.573,-52.908) U2.4@-31.428,-51.425 ; U2.4@-31.631,-51.308 cw(c-35.023,-51.308) -32.624,-53.706 ccw(c-35.023,-51.308) U2.4@-31.631,-51.308 ; U2.4@-31.631,-51.308 cw(c-32.402,-51.308) -31.857,-51.853 ccw(c-32.402,-51.308) U2.4@-31.631,-51.308 ; U2.4@-30.099,-51.181 cw(c-30.766,-50.514) -31.405,-51.209 ccw(c-30.766,-50.514) U2.4@-30.099,-51.181 ; R18.1@-0.762,-45.308 cw(c2.901,-45.308) C5.2@1.062,-42.14 ; R18.1@-0.762,-45.308 cw(c2.901,-45.308) C5.2@1.062,-42.14 ; R18.1@-0.762,-45.308 cw(c2.901,-45.308) C5.2@1.062,-42.14 ; -0.762,-43.571 cw(c1.893,-43.571) C5.2@0.56,-41.275 ; -0.762,-43.571 cw(c1.893,-43.571) C5.2@0.56,-41.275 ; -0.762,-43.571 cw(c1.893,-43.571) C5.2@0.56,-41.275 ; -0.272,-43.48 ccw(c-1.094,-42.663) C5.2@-0.206,-41.918 ; -0.272,-43.48 ccw(c-1.094,-42.663) C5.2@-0.206,-41.918 ; -0.272,-43.48 ccw(c-1.094,-42.663) C5.2@-0.206,-41.918 ; U2.4@-30.816,-51.898 cw(c-29.718,-52.995) -29.718,-51.443 ccw(c-29.718,-52.995) U2.4@-30.816,-51.898
  Bottom Layer w2: P1.1@-43.561,-40.513 -43.561,-42.037 -41.275,-44.323 ; P1.1@-42.882,-40.767 ccw(c-38.177,-40.767) -41.504,-44.094 ; Q1.3@-41.275,-55.245 -41.275,-44.323 ; -41.275,-44.323 -34.798,-50.8 ; -34.798,-50.8 cw(c-34.798,-55.27) U2.4@-31.079,-52.789 ; -34.798,-50.8 cw(c-34.798,-55.27) U2.4@-31.079,-52.789 ; -34.798,-50.8 cw(c-34.798,-55.27) U2.4@-31.079,-52.789 ; -34.798,-50.8 -28.448,-50.8 U2.4@-27.686,-51.562 ; -33.291,-50.8 ccw(c-33.291,-47.249) U2.4@-30.78,-49.76 ; -33.291,-50.8 ccw(c-33.291,-47.249) U2.4@-30.78,-49.76 ; -33.291,-50.8 ccw(c-33.291,-47.249) U2.4@-30.78,-49.76 ; U2.4@-32.312,-51.687 ccw(c-31.885,-50.488) U2.4@-31.34,-51.638 ; U2.4@-32.312,-51.687 ccw(c-31.885,-50.488) U2.4@-31.34,-51.638 ; U2.4@-32.312,-51.687 ccw(c-31.885,-50.488) U2.4@-31.34,-51.638 ; U2.4@-32.312,-51.687 ccw(c-31.885,-50.488) U2.4@-31.34,-51.638 ; U2.4@-32.312,-51.687 ccw(c-31.885,-50.488) U2.4@-31.34,-51.638 ; U2.4@-31.861,-51.29 ccw(c-30.398,-51.361) U2.4@-31.482,-52.345 ; U2.4@-31.861,-51.29 ccw(c-30.398,-51.361) U2.4@-31.482,-52.345 ; U2.4@-31.861,-51.29 ccw(c-30.398,-51.361) U2.4@-31.482,-52.345 ; U2.4@-31.861,-51.29 ccw(c-30.398,-51.361) U2.4@-31.482,-52.345 ; U2.4@-31.861,-51.29 ccw(c-30.398,-51.361) U2.4@-31.482,-52.345 ; U2.4@-27.686,-51.562 ccw(c-29.295,-53.171) -29.799,-50.952 cw(c-29.295,-53.171) U2.4@-27.686,-51.562 ; U2.4@-28.305,-50.943 ccw(c-26.543,-49.182) -26.543,-51.673 cw(c-26.543,-49.182) U2.4@-28.305,-50.943
  other v1: -12.573,-71.628 -8.382,-68.199 22.479,-59.309 23.622,-58.42 -37.592,-54.483 -15.621,-53.721 -14.224,-53.721 -12.827,-53.721 -11.43,-53.721 -10.033,-53.721 -8.636,-53.721 -15.621,-52.197 -14.224,-52.197 -12.827,-52.197 -11.43,-52.197 -10.033,-52.197 -8.636,-52.197 -31.496,-51.308 -29.718,-51.308 -28.194,-51.308 -15.621,-50.673 -14.224,-50.673 -12.827,-50.673 -11.43,-50.673 -10.033,-50.673 -8.636,-50.673 -15.621,-49.022 -14.224,-49.022 -12.827,-49.022 -11.43,-49.022 -10.033,-49.022 -8.636,-49.022 -31.496,-48.895 -29.845,-48.895 -35.052,-45.847 -35.941,-44.831 -35.433,-43.815
"IN AB": opamp1.2 opamp1.5 R8.1 R9.2 VR1.1 | length 50.2
  Bottom Layer w0.508: -28.385,-63.056 ccw(c-27.311,-64.129) -28.829,-64.129 -28.829,-64.643 ccw(c-26.683,-64.643) -28.201,-66.16 ; -28.384,-63.056 -28.135,-62.806 cw(c-27.051,-63.89) -27.051,-62.357 -24.923,-62.357 ccw(c-24.923,-61.056) -24.003,-61.976 ccw(c-24.616,-61.363) -23.749,-61.363 -23.749,-58.547 ; -28.2,-66.161 -27.813,-66.548 -27.051,-67.31 ; VR1.1@-26.035,-70.612 -26.035,-68.326 -27.051,-67.31 ; opamp1.2@-26.022,-59.69 -24.892,-59.69 -23.749,-58.547 ; R9.2@-24.003,-67.437 R9.2@-24.167,-67.273 R8.1@-25.49,-65.95 -25.691,-65.95 -27.051,-67.31 ; opamp1.5@-20.955,-57.15 opamp1.5@-21.222,-57.15 -22.352,-57.15 -23.749,-58.547 ; -26.579,-66.838 cw(c-25.561,-67.857) R8.1@-25.561,-66.416 ; -26.579,-66.838 cw(c-25.561,-67.857) R8.1@-25.561,-66.416 ; -26.579,-66.838 cw(c-25.561,-67.857) R8.1@-25.561,-66.416 ; VR1.1@-26.403,-70.244 ccw(c-27.292,-69.355) -26.035,-69.355 ; VR1.1@-26.403,-70.244 ccw(c-27.292,-69.355) -26.035,-69.355 ; VR1.1@-26.403,-70.244 ccw(c-27.292,-69.355) -26.035,-69.355 ; -26.035,-69.268 ccw(c-24.655,-69.268) VR1.1@-25.631,-70.244 ; -26.035,-69.268 ccw(c-24.655,-69.268) VR1.1@-25.631,-70.244 ; -26.035,-69.268 ccw(c-24.655,-69.268) VR1.1@-25.631,-70.244 ; R8.1@-25.49,-66.346 cw(c-25.49,-67.302) -24.814,-66.626 ; R8.1@-25.49,-66.346 cw(c-25.49,-67.302) -24.814,-66.626 ; R8.1@-25.49,-66.346 cw(c-25.49,-67.302) -24.814,-66.626 ; opamp1.2@-25.222,-59.644 ccw(c-25.222,-58.736) -24.58,-59.378 ; opamp1.2@-25.222,-59.644 ccw(c-25.222,-58.736) -24.58,-59.378 ; opamp1.2@-25.222,-59.644 ccw(c-25.222,-58.736) -24.58,-59.378 ; R8.1@-25.094,-65.95 ccw(c-24.138,-65.95) -24.814,-66.626 ; R8.1@-25.094,-65.95 ccw(c-24.138,-65.95) -24.814,-66.626 ; R8.1@-25.094,-65.95 ccw(c-24.138,-65.95) -24.814,-66.626 ; -24.843,-66.597 cw(c-25.519,-67.273) R9.2@-24.563,-67.273 ; -24.843,-66.597 ccw(c-24.167,-65.921) R9.2@-24.167,-66.877 ; -24.843,-66.597 cw(c-25.519,-67.273) R9.2@-24.563,-67.273 ; -24.843,-66.597 ccw(c-24.167,-65.921) R9.2@-24.167,-66.877 ; -24.843,-66.597 cw(c-25.519,-67.273) R9.2@-24.563,-67.273 ; -24.843,-66.597 ccw(c-24.167,-65.921) R9.2@-24.167,-66.877 ; -22.664,-57.462 cw(c-22.022,-58.104) opamp1.5@-22.022,-57.196 ; -22.664,-57.462 cw(c-22.022,-58.104) opamp1.5@-22.022,-57.196 ; -22.664,-57.462 cw(c-22.022,-58.104) opamp1.5@-22.022,-57.196
"MICRO 1": P2.3 R11.1 R12.2 | length 24.7
  Bottom Layer w0.508: R12.2@-12.827,-68.133 R11.1@-10.795,-68.133 -10.795,-68.58 -9.652,-69.723 0,-69.723 0.722,-70.445 P2.3@0.722,-71.247 0.722,-71.334 P2.3@0.762,-71.374 ; R12.2@-12.447,-68.413 cw(c-11.771,-69.089) -11.771,-68.133 ; R12.2@-12.447,-68.413 cw(c-11.771,-69.089) -11.771,-68.133 ; R12.2@-12.447,-68.413 cw(c-11.771,-69.089) -11.771,-68.133 ; R12.2@-12.447,-67.853 ccw(c-11.771,-67.177) -11.771,-68.133 ; R12.2@-12.447,-67.853 ccw(c-11.771,-67.177) -11.771,-68.133 ; R12.2@-12.447,-67.853 ccw(c-11.771,-67.177) -11.771,-68.133 ; -11.851,-68.133 cw(c-11.851,-69.089) R11.1@-11.175,-68.413 ; -11.851,-68.133 ccw(c-11.851,-67.177) R11.1@-11.175,-67.853 ; -11.851,-68.133 cw(c-11.851,-69.089) R11.1@-11.175,-68.413 ; -11.851,-68.133 ccw(c-11.851,-67.177) R11.1@-11.175,-67.853 ; -11.851,-68.133 cw(c-11.851,-69.089) R11.1@-11.175,-68.413 ; -11.851,-68.133 ccw(c-11.851,-67.177) R11.1@-11.175,-67.853
"MICRO 2": P2.4 R6.1 R7.2 | length 20.3
  Bottom Layer w0.508: R7.2@-2.921,-68.133 R6.1@-0.889,-68.133 -0.696,-68.326 1.27,-68.326 1.972,-69.028 P2.4@1.972,-71.247 ; R7.2@-2.541,-68.413 cw(c-1.865,-69.089) -1.865,-68.133 ; R7.2@-2.541,-68.413 cw(c-1.865,-69.089) -1.865,-68.133 ; R7.2@-2.541,-68.413 cw(c-1.865,-69.089) -1.865,-68.133 ; R7.2@-2.541,-67.853 ccw(c-1.865,-67.177) -1.865,-68.133 ; R7.2@-2.541,-67.853 ccw(c-1.865,-67.177) -1.865,-68.133 ; R7.2@-2.541,-67.853 ccw(c-1.865,-67.177) -1.865,-68.133 ; -1.945,-68.133 cw(c-1.945,-69.089) R6.1@-1.269,-68.413 ; -1.945,-68.133 ccw(c-1.945,-67.177) R6.1@-1.269,-67.853 ; -1.945,-68.133 cw(c-1.945,-69.089) R6.1@-1.269,-68.413 ; -1.945,-68.133 ccw(c-1.945,-67.177) R6.1@-1.269,-67.853 ; -1.945,-68.133 cw(c-1.945,-69.089) R6.1@-1.269,-68.413 ; -1.945,-68.133 ccw(c-1.945,-67.177) R6.1@-1.269,-67.853 ; R6.1@-0.509,-67.853 ccw(c0.633,-66.711) 0.633,-68.326 ; R6.1@-0.509,-67.853 ccw(c0.633,-66.711) 0.633,-68.326 ; R6.1@-0.509,-67.853 ccw(c0.633,-66.711) 0.633,-68.326
"MICRO 3": P2.5 R1.1 R2.2 | length 21.1
  Bottom Layer w0.508: P2.5@3.222,-71.247 3.222,-69.549 4.826,-67.945 7.088,-67.945 R2.2@7.251,-68.108 9.258,-68.108 R1.1@9.283,-68.133 ; 5.801,-67.945 cw(c5.801,-69.458) R2.2@6.871,-68.388 ; 5.801,-67.945 cw(c5.801,-69.458) R2.2@6.871,-68.388 ; 5.801,-67.945 cw(c5.801,-69.458) R2.2@6.871,-68.388 ; R2.2@7.631,-68.388 cw(c8.307,-69.064) 8.307,-68.108 ; R2.2@7.631,-68.388 cw(c8.307,-69.064) 8.307,-68.108 ; R2.2@7.631,-68.388 cw(c8.307,-69.064) 8.307,-68.108 ; R2.2@7.631,-67.828 ccw(c8.307,-67.152) 8.307,-68.108 ; R2.2@7.631,-67.828 ccw(c8.307,-67.152) 8.307,-68.108 ; R2.2@7.631,-67.828 ccw(c8.307,-67.152) 8.307,-68.108 ; 8.167,-68.108 cw(c8.167,-69.15) R1.1@8.903,-68.413 ; 8.167,-68.108 cw(c8.167,-69.15) R1.1@8.903,-68.413 ; 8.167,-68.108 cw(c8.167,-69.15) R1.1@8.903,-68.413 ; 8.287,-68.108 ccw(c8.287,-67.237) R1.1@8.903,-67.853 ; 8.287,-68.108 ccw(c8.287,-67.237) R1.1@8.903,-67.853 ; 8.287,-68.108 ccw(c8.287,-67.237) R1.1@8.903,-67.853
NetC5_1: C5.1 C6.1 D2.1 D5.2 D8.2 P3.2 P4.2 R14.1 | length 139.8
  Bottom Layer w1: C6.1@14.351,-41.275 15.301,-42.225 R14.1@15.301,-45.339 ; C6.1@13.764,-42.025 cw(c10.756,-45.432) R14.1@15.301,-45.432 ; C6.1@13.764,-42.025 cw(c10.756,-45.432) R14.1@15.301,-45.432 ; C6.1@13.764,-42.025 cw(c10.756,-45.432) R14.1@15.301,-45.432 ; C6.1@14.426,-41.275 cw(c12.713,-43.215) 15.301,-43.215 ; C6.1@14.426,-41.275 cw(c12.713,-43.215) 15.301,-43.215 ; C6.1@14.426,-41.275 cw(c12.713,-43.215) 15.301,-43.215 ; 14.839,-43.646 cw(c15.854,-42.972) C6.1@15.07,-42.04 ; 14.839,-43.646 cw(c15.854,-42.972) C6.1@15.07,-42.04 ; 14.839,-43.646 cw(c15.854,-42.972) C6.1@15.07,-42.04
  Bottom Layer w2: D2.1@-49.294,-47.988 -49.294,-41.184 -45.067,-36.957 14.501,-36.957 ; 4.064,-37.084 4.52,-37.54 C5.1@4.52,-41.275 ; C6.1@14.426,-41.275 14.426,-37.032 14.501,-36.957 ; D8.2@19.685,-36.957 D8.2@19.431,-36.957 ; P4.2@28.269,-40.64 28.269,-36.905 28.194,-36.83 ; P3.2@37.846,-41.402 37.846,-39.66 ccw(c35.306,-39.66) 37.102,-37.864 36.83,-37.592 ccw(c35.297,-39.125) 35.297,-36.957 D5.2@32.893,-36.957 32.766,-36.83 28.194,-36.83 ; 14.501,-36.957 D8.2@19.431,-36.957 ; D8.2@19.431,-36.957 19.558,-36.83 28.194,-36.83
NetD2_2: D2.2 L1.1 Q1.2 | length 31.1
  Top Layer w2: D2.2@-45.72,-51.435 -34.43,-51.435 -31.763,-54.102 -31.75,-54.102 -31.695,-54.157 L1.1@-23.241,-54.157 ; Q1.2@-37.465,-59.182 -32.131,-53.848
NetD3_2: D3.2 D5.1 P3.1 Q2.2 | length 44.9
  Bottom Layer w2: D5.1@32.893,-44.577 37.211,-44.577 D3.2@40.767,-48.133 ; D3.2@40.894,-48.133 D3.2@40.767,-48.133 ; P3.1@41.858,-41.275 45.339,-44.756 Q2.2@45.339,-50.546 ; 43.18,-50.546 D3.2@40.767,-48.133 ; 43.307,-50.546 Q2.2@45.212,-50.546 ; D3.2@41.056,-48.422 ccw(c45.339,-44.139) Q2.2@45.339,-50.196 ; D3.2@41.056,-48.422 ccw(c45.339,-44.139) Q2.2@45.339,-50.196 ; D3.2@41.056,-48.422 ccw(c45.339,-44.139) Q2.2@45.339,-50.196 ; 43.822,-49.789 cw(c43.305,-51.721) Q2.2@45.036,-50.721 ; 43.822,-49.789 cw(c43.305,-51.721) Q2.2@45.036,-50.721 ; 43.822,-49.789 cw(c43.305,-51.721) Q2.2@45.036,-50.721 ; Q2.2@45.212,-50.546 Q2.2@45.339,-50.546 ; Q2.2@45.212,-50.546 45.339,-50.673 Q2.2@45.339,-50.546
NetD4_2: D4.2 R17.2 | length 4.1
  Top Layer w0.75: R17.2@4.826,-73.218 6.162,-73.218 6.858,-73.914 ; D4.2@6.858,-75.057 6.858,-73.914 ; D4.2@7.112,-74.503 cw(c7.666,-73.914) 6.858,-73.914
NetD6_2: D6.2 R19.2 | length 4.1
  Top Layer w0.75: R19.2@-8.89,-73.218 -7.681,-73.218 -6.985,-73.914 ; D6.2@-6.985,-75.184 -6.985,-73.914 ; D6.2@-6.66,-74.462 cw(c-6.361,-73.914) -6.985,-73.914
NetD7_2: D7.2 D8.1 P4.1 Q4.2 | length 64
  Bottom Layer w2: D8.1@19.431,-44.704 23.495,-40.64 P4.1@24.309,-40.64 24.309,-53.138 33.528,-62.357 Q4.2@33.528,-62.484 ; D7.2@27.559,-61.341 27.686,-61.341 28.829,-62.484 Q4.2@33.528,-62.484 ; Q4.2@33.528,-62.611 Q4.2@33.528,-62.484 ; Q4.2@33.655,-62.484 Q4.2@33.528,-62.484 ; 22.066,-42.069 cw(c24.309,-44.312) P4.1@24.309,-41.14 ; 22.066,-42.069 cw(c24.309,-44.312) P4.1@24.309,-41.14 ; 22.066,-42.069 cw(c24.309,-44.312) P4.1@24.309,-41.14 ; 22.142,-41.721 ccw(c21.403,-38.962) P4.1@23.876,-40.39 ; 22.142,-41.721 ccw(c21.403,-38.962) P4.1@23.876,-40.39 ; 22.142,-41.721 ccw(c21.403,-38.962) P4.1@23.876,-40.39 ; D7.2@27.511,-61.135 ccw(c30.768,-57.878) 30.768,-62.484 ; D7.2@27.511,-61.135 ccw(c30.768,-57.878) 30.768,-62.484 ; D7.2@27.511,-61.135 ccw(c30.768,-57.878) 30.768,-62.484
NetD9_2: D9.2 R20.2 | length 5
  Top Layer w0.7: R20.2@-2.032,-73.218 -0.823,-73.218 -0.127,-73.914 ; R20.2@-1.72,-72.879 ccw(c-0.901,-72.06) -0.901,-73.218 ; D9.2@-0.127,-75.184 -0.127,-73.914 ; D9.2@0.198,-74.433 cw(c0.451,-73.914) -0.127,-73.914
NetD10_2: D10.2 R23.2
  other v1: -35.433,-41.91
NetF1_1: F1.0 F1.1 P1.2 | length 54.5
  Top Layer w1.27: P1.2@-39.624,-40.767 -38.406,-39.549 ; F1.0@-31.139,-39.549 -38.406,-39.549 ; F1.0@-30.988,-39.497 -30.936,-39.549 F1.1@-25.639,-39.549 ; P1.2@-39.708,-40.481 cw(c-37.459,-42.73) -37.459,-39.549 ; P1.2@-39.708,-40.481 cw(c-37.459,-42.73) -37.459,-39.549 ; P1.2@-39.708,-40.481 cw(c-37.459,-42.73) -37.459,-39.549 ; P1.2@-39.36,-39.904 ccw(c-39.271,-38.684) -38.406,-39.549 ; P1.2@-39.36,-39.904 ccw(c-39.271,-38.684) -38.406,-39.549 ; P1.2@-39.36,-39.904 ccw(c-39.271,-38.684) -38.406,-39.549 ; P1.2@-38.996,-40.014 ccw(c-37.722,-37.762) -36.428,-40.003 ; P1.2@-38.996,-40.014 ccw(c-37.722,-37.762) -36.428,-40.003 ; P1.2@-38.996,-40.014 ccw(c-37.722,-37.762) -36.428,-40.003 ; P1.2@-38.81,-41.379 cw(c-34.393,-45.796) -34.393,-39.549 ; P1.2@-38.81,-41.379 cw(c-34.393,-45.796) -34.393,-39.549 ; P1.2@-38.81,-41.379 cw(c-34.393,-45.796) -34.393,-39.549 ; P1.2@-38.61,-40.47 cw(c-37.786,-40.169) -38.406,-39.549 ; P1.2@-38.61,-40.47 cw(c-37.786,-40.169) -38.406,-39.549 ; P1.2@-38.61,-40.47 cw(c-37.786,-40.169) -38.406,-39.549 ; P1.2@-38.572,-40.605 cw(c-37.584,-40.416) -38.087,-39.544 ; P1.2@-38.572,-40.605 cw(c-37.584,-40.416) -38.087,-39.544 ; P1.2@-38.572,-40.605 cw(c-37.584,-40.416) -38.087,-39.544
NetJP1_1: JP1.1 JP2.1 L1.2 | length 20.1
  Top Layer w2: L1.2@-23.241,-45.212 -11.303,-45.212 -8.255,-42.164 -8.128,-42.164 -8.098,-42.194 JP1.1@-8.001,-42.194 JP2.1@-4.445,-42.194
Netopamp1_1: opamp1.1 R3.1 | length 10.2
  Bottom Layer w0.508: R3.1@-28.956,-60.706 -28.702,-60.96 opamp1.1@-26.022,-60.96 ; R3.1@-28.576,-60.36 ccw(c-27.127,-58.911) -27.127,-60.96 ; R3.1@-28.576,-60.36 ccw(c-27.127,-58.911) -27.127,-60.96 ; R3.1@-28.576,-60.36 ccw(c-27.127,-58.911) -27.127,-60.96 ; R3.1@-28.556,-60.899 cw(c-28.131,-61.268) -27.849,-60.78 ; R3.1@-28.556,-60.899 cw(c-28.131,-61.268) -27.849,-60.78 ; R3.1@-28.556,-60.899 cw(c-28.131,-61.268) -27.849,-60.78
Netopamp1_7: opamp1.7 R5.2 | length 22.7
  Bottom Layer w0.4: opamp1.7@-21.222,-59.69 -18.796,-59.69 R5.2@-18.288,-59.182 ; opamp1.7@-20.541,-59.69 ccw(c-20.541,-57.095) R5.2@-18.706,-58.93 ; opamp1.7@-20.541,-59.69 ccw(c-20.541,-57.095) R5.2@-18.706,-58.93 ; opamp1.7@-20.541,-59.69 ccw(c-20.541,-57.095) R5.2@-18.706,-58.93 ; opamp1.7@-20.335,-59.74 cw(c-20.035,-59.913) -20.125,-59.578 ; opamp1.7@-20.335,-59.74 cw(c-20.035,-59.913) -20.125,-59.578 ; opamp1.7@-20.335,-59.74 cw(c-20.035,-59.913) -20.125,-59.578 ; -19.652,-59.476 cw(c-19.243,-60.185) R5.2@-18.691,-59.58 ; -19.652,-59.476 cw(c-19.243,-60.185) R5.2@-18.691,-59.58 ; -19.652,-59.476 cw(c-19.243,-60.185) R5.2@-18.691,-59.58 ; -19.576,-59.69 ccw(c-19.576,-58.06) R5.2@-18.423,-59.213 ; -19.576,-59.69 ccw(c-19.576,-58.06) R5.2@-18.423,-59.213 ; -19.576,-59.69 ccw(c-19.576,-58.06) R5.2@-18.423,-59.213 ; -19.179,-59.203 cw(c-18.856,-59.761) R5.2@-18.422,-59.285 ; -19.179,-59.203 cw(c-18.856,-59.761) R5.2@-18.422,-59.285 ; -19.179,-59.203 cw(c-18.856,-59.761) R5.2@-18.422,-59.285 ; -19.13,-59.621 cw(c-18.886,-60.043) R5.2@-18.627,-59.629 ; -19.13,-59.621 ccw(c-19.433,-59.096) R5.2@-18.833,-59.183 ; -19.13,-59.621 cw(c-18.886,-60.043) R5.2@-18.627,-59.629 ; -19.13,-59.621 ccw(c-19.433,-59.096) R5.2@-18.833,-59.183 ; -19.13,-59.621 cw(c-18.886,-60.043) R5.2@-18.627,-59.629 ; -19.13,-59.621 ccw(c-19.433,-59.096) R5.2@-18.833,-59.183
NetR2_1: R2.1 U1.1 | length 6.1
  Bottom Layer w0.508: R2.1@7.251,-66.208 7.493,-65.966 U1.1@7.493,-63.627 ; R2.1@7.071,-65.928 ccw(c6.052,-64.909) 7.493,-64.909 ; R2.1@7.071,-65.928 ccw(c6.052,-64.909) 7.493,-64.909 ; R2.1@7.071,-65.928 ccw(c6.052,-64.909) 7.493,-64.909
NetR7_1: R7.1 U4.1 | length 7.9
  Bottom Layer w0.508: U4.1@-3.556,-63.627 -2.921,-64.262 ; U4.1@-2.968,-63.739 ccw(c-2.631,-63.972) -2.921,-64.262 ; R7.1@-2.921,-66.233 -2.921,-64.262 ; R7.1@-3.201,-65.953 ccw(c-3.877,-65.277) -2.921,-65.277 ; R7.1@-3.201,-65.953 ccw(c-3.877,-65.277) -2.921,-65.277 ; R7.1@-3.201,-65.953 ccw(c-3.877,-65.277) -2.921,-65.277 ; -2.921,-65.277 ccw(c-1.965,-65.277) R7.1@-2.641,-65.953 ; -2.921,-65.277 ccw(c-1.965,-65.277) R7.1@-2.641,-65.953 ; -2.921,-65.277 ccw(c-1.965,-65.277) R7.1@-2.641,-65.953